# Altium PCB ac-control-pcb.PcbDoc
Units mil, origin at the board's own origin, x right, y up, seen from the top; angles counter-clockwise.
Board outline 4035 x 1820 mil, 2 copper layers (Top Layer, Bottom Layer); 12 components, 21 nets, 90 pads, 0 vias.
Unrouted connection lines stored in the file: 1.
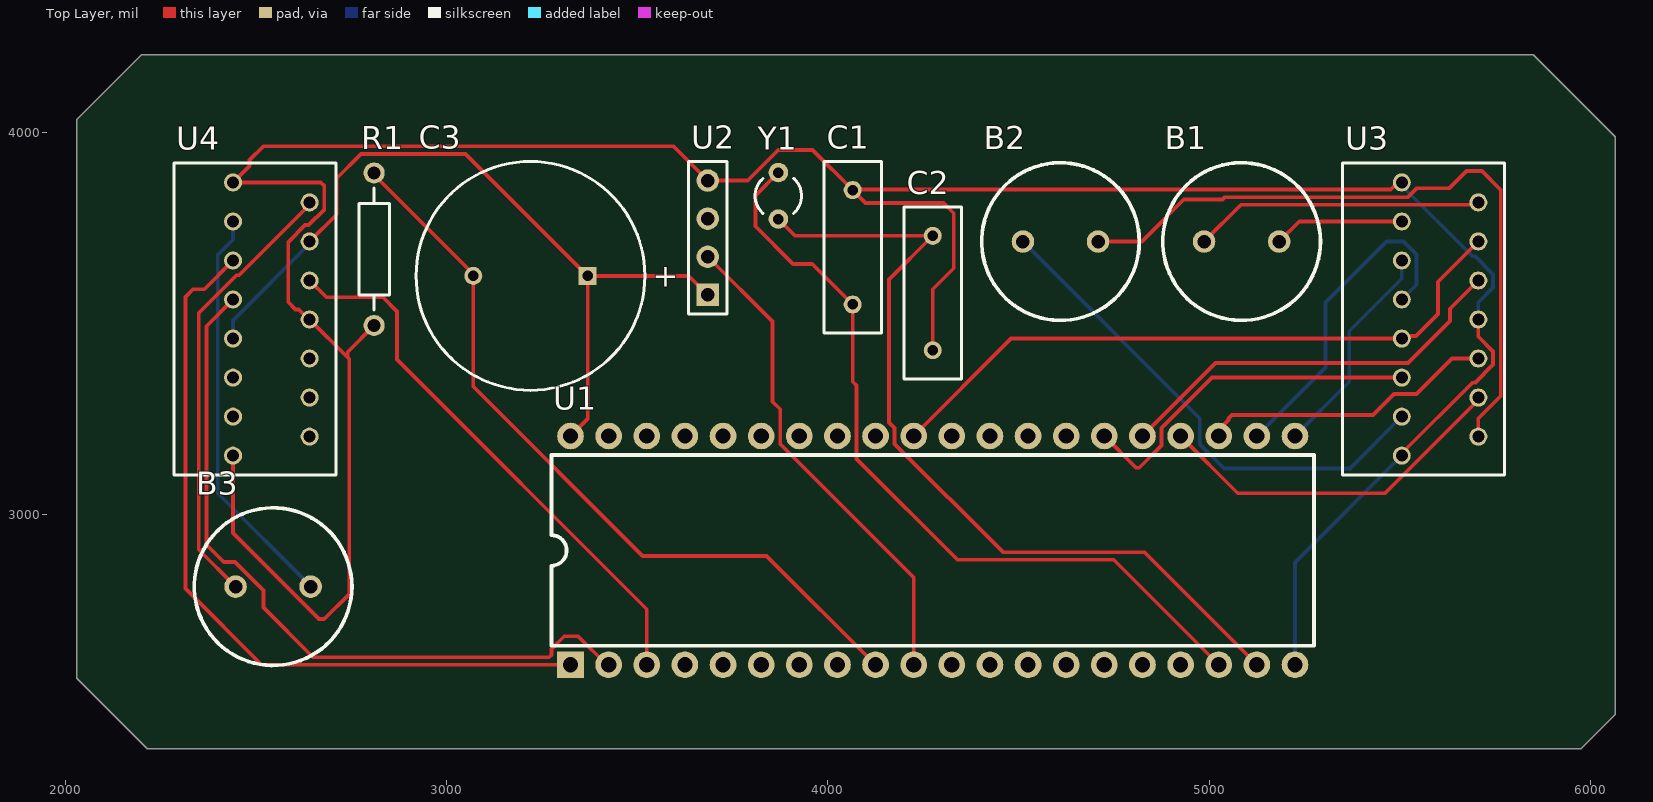
[diagram p0: Top Layer view]
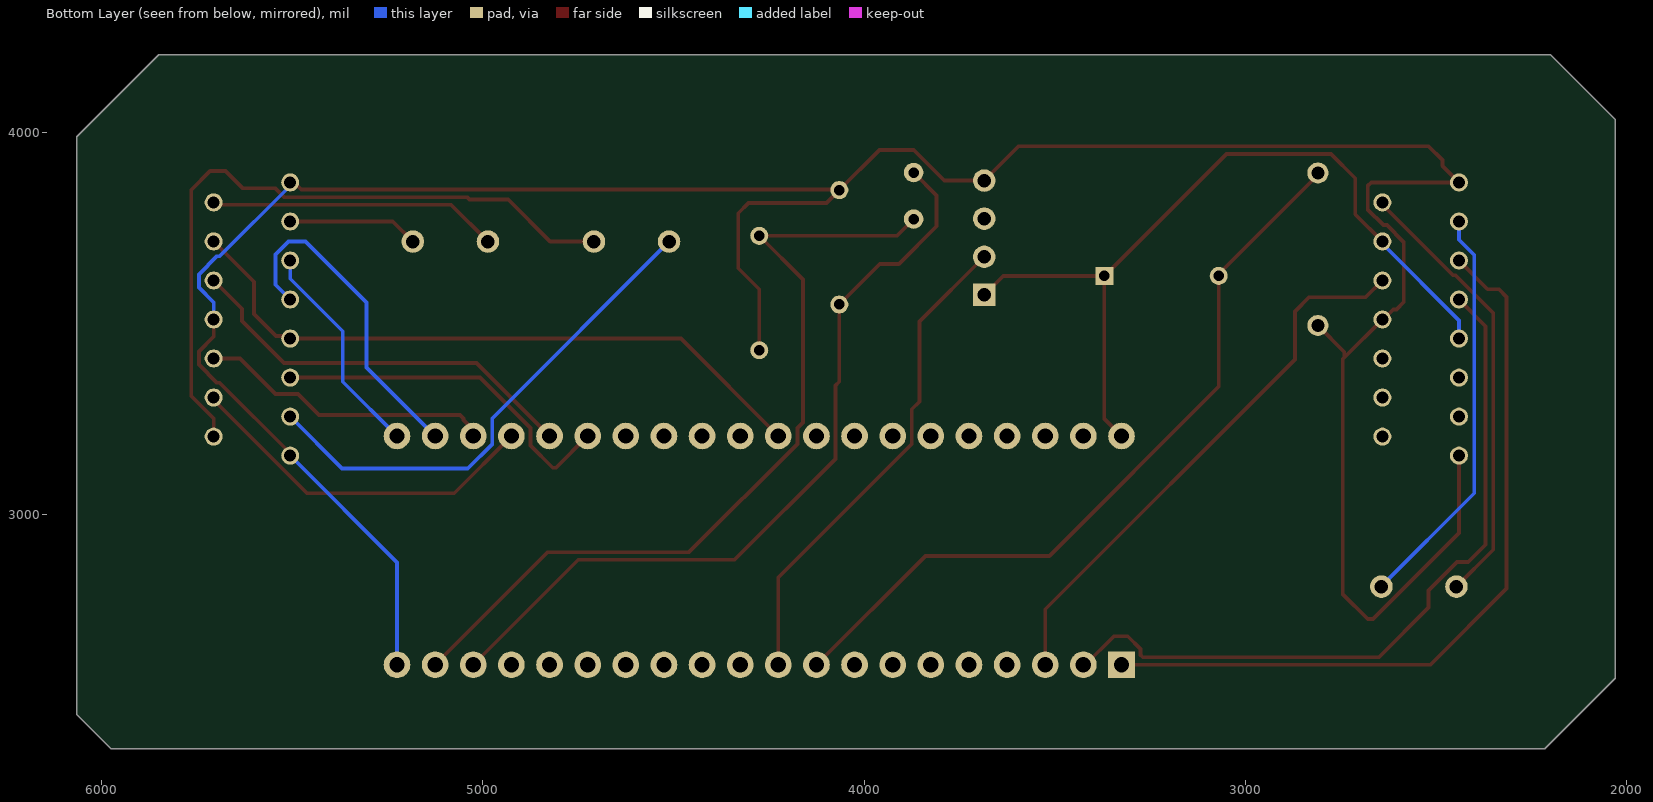
[diagram p1: Bottom Layer view, seen from below]

## Layer stack, top to bottom
Top Solder: solder mask 0.4, Solder Resist, Dk 3.5
Top Layer: signal copper 1.4
Dielectric 1: dielectric 12.6, FR-4, Dk 4.8
Bottom Layer: signal copper 1.4
Bottom Solder: solder mask 0.4, Solder Resist, Dk 3.5

## Board outline
2215,2385 2030,2570 2030,4035 2200,4205 5850,4205 6065,3990 6065,2475 5975,2385

## Design rules (kind name [scope] priority, off if disabled: settings)
Clearance [All] p1: gap=10 ignorepadtopadclearanceinfootprint=FALSE except(0: Arc-Hole Track-Hole SMDPad-Hole THPad-Hole Via-Hole Fill-Hole Poly-Hole Region-Hole Text-Hole)
PolygonConnect [All] p1: connectstyle=Relief reliefconductorwidth=10 reliefentries=4 polygonreliefangle="90 Angle" airgapwidth=10
RoutingVias [All] p1: holewidth=28 width=50 viastyle="Through Hole" minholewidth=28 minwidth=50 maxholewidth=28 maxwidth=50
SolderMaskExpansion [All] p1: expansion=4
Width [All] p1: maxlimit=10 minlimit=10 preferedwidth=10
30 further rules are at their usual default settings.

## Components (designator, comment, footprint, x,y, rotation, side; value= is the part's Value field where it differs from the comment)
B1 "Motor-refrigeration" RB5-10.5 5085,3715 r0 top
B2 "Motor-heating" RB5-10.5 4610,3715 r0 top
B3 "Motor-dehumidification" RB5-10.5 2545,2810 r0 top
C1 "Cap" RAD-0.3 4065,3700 r90 top value=22pF
C2 "Cap" RAD-0.3 4275,3580 r90 top value=22pF
C3 "Cap Pol1" RB7.6-15 3220,3625 r0 top value=10uF
R1 "Res2" AXIAL-0.4 2810,3695 r90 top value=10K
U1 "AT89C52" DIP-40W 3325,2605 r90 top
U2 "DHT11" HDR1X4 3685,3575 r90 top
U3 "L298" L298 5505,3870 r0 top
U4 "L298" L298 2440,3870 r0 top
Y1 "XTAL" R38 3870,3835 r0 top

## Footprints (in the part's own frame and the unit in brackets; to place one, negate y for a bottom-side part, rotate by r counter-clockwise, add the part's x,y. Pads: shape width x height; smd on the part's side, far side on the other; paste and mask are expansions set on the pad)
AXIAL-0.4 [mm] "Axial Device, Thru-Hole; 2 Leads; 0.4 in Pin Spacing"
  round 1.4 hole 0.85: 1(-5.08,0) 2(5.08,0)
  silkscreen extent -4.06,-1.02 4.06,1.02
DIP-40W [mil]
  rect 70x70 hole 40: 1(0,0)
  round 70 hole 40: 2(0,-100) 3(0,-200) 4(0,-300) 5(0,-400) 6(0,-500) 7(0,-600) 8(0,-700) 9(0,-800) 10(0,-900) 11(0,-1000) 12(0,-1100) 13(0,-1200) 14(0,-1300) 15(0,-1400) 16(0,-1500) 17(0,-1600) 18(0,-1700) 19(0,-1800) 20(0,-1900) 21(600,-1900) 22(600,-1800) 23(600,-1700) 24(600,-1600) 25(600,-1500) 26(600,-1400) 27(600,-1300) 28(600,-1200) 29(600,-1100) 30(600,-1000) 31(600,-900) 32(600,-800) 33(600,-700) 34(600,-600) 35(600,-500) 36(600,-400) 37(600,-300) 38(600,-200) 39(600,-100) 40(600,0)
  silkscreen extent 50,-1950 550,50
HDR1X4 [mm] "Connector; Header; 4 Position"
  rect 1.5x1.5 hole 0.9: 1(0,0)
  round 1.5 hole 0.9: 2(2.54,0) 3(5.08,0) 4(7.62,0)
  silkscreen extent -1.27,-1.27 8.89,1.27
L298 [mm]
  round 1.2 hole 0.8: 1(0,0) 2(5.1,-1.33) 3(0,-2.6) 4(5.1,-3.93) 5(0,-5.2) 6(5.1,-6.53) 7(0,-7.8) 8(5.1,-9.13) 9(0,-10.4) 10(5.1,-11.73) 11(0,-13) 12(5.1,-14.33) 13(0,-15.6) 14(5.1,-16.93) 15(0,-18.2)
  silkscreen extent -3.94,-19.5 6.86,1.3
R38 [mm] "Crystal, Thru-Hole; 2 Leads; Body 3.1 x 8.2 mm (Dia.xH)"
  round 1.3 hole 0.7: 1(0,1.55) 2(0,-1.55)
  silkscreen extent -1.55,-1.19 1.55,1.17
RAD-0.3 [mm] "Radial Cap, Thru-Hole; 2 Leads; 0.3 in Pin Spacing"
  round 1.2 hole 0.7: 1(-3.81,0) 2(3.81,0)
  silkscreen extent -5.71,-1.91 5.71,1.91
RB5-10.5 [mm] "Capacitor (Radial); 2 Leads"
  round 1.5 hole 0.9: 1(-2.5,0) 2(2.5,0)
  silkscreen extent -5.25,-5.25 5.25,5.25
RB7.6-15 [mm] "Polarized Capacitor (Radial); 2 Leads"
  rect 1.2x1.2 hole 0.7: 1(3.81,0)
  round 1.2 hole 0.7: 2(-3.81,0)
  silkscreen extent -7.62,-7.62 7.62,7.62

## Part data
B1 B2 B3: library part Motor, "Motor, General Kind", LatestRevisionDate=17-Jul-2002, LatestRevisionNote="Re-released for DXP Platform.", PackageDescription="Capacitor (Radial); 2 Leads", PackageReference=RB5-10.5, Published=24-Mar-1999, Publisher="Altium Limited"
C1 C2: "Capacitor", LatestRevisionDate=17-Jul-2002, LatestRevisionNote="Re-released for DXP Platform.", PackageDescription="Radial Cap, Thru-Hole; 2 Leads; 0.3 in Pin Spacing", PackageReference=RAD-0.3, Published=8-Jun-2000, Publisher="Altium Limited"
C3: "Polarized Capacitor (Radial)", LatestRevisionDate=17-Jul-2002, LatestRevisionNote="Re-released for DXP Platform.", PackageDescription="Polarized Capacitor (Radial); 2 Leads", PackageReference=RB7.6-15, Published=8-Jun-2000, Publisher="Altium Limited"
R1: "Resistor", LatestRevisionDate=17-Jul-2002, LatestRevisionNote="Re-released for DXP Platform.", PackageDescription="Axial Device, Thru-Hole; 2 Leads; 0.4 in Pin Spacing", PackageReference=AXIAL-0.4, Published=8-Jun-2000, Publisher="Altium Limited"
U1: "8-Bit Microcontroller with 8K Flash ROM"
U2: library part Component_1
U3 U4: library part L298N
Y1: "Crystal Oscillator", LatestRevisionDate=17-Jul-2002, LatestRevisionNote="Re-released for DXP Platform.", PackageDescription="Crystal, Thru-Hole; 2 Leads; Body 3.1 x 8.2 mm (Dia.xH)", PackageReference=R38, Published=8-Jun-2000, Publisher="Altium Limited"

## Nets (pads, with @x,y where several pads share a name; then routed paths per layer and width w, separated by ;. In a path a pad name is that pad's centre, name@x,y a point inside that pad or via, vN(x,y) a via of type N, cw(c..) or ccw(c..) an arc to the next point about the centre after c; other vN are vias at no path point)
+: C3.1 U1.31 U1.40 U2.1 U3.4 U3.9 U4.4 U4.9 | length 3866.2
  Top Layer w10: U4.4 2711.89,3786.37 2711.89,3881.03 2775.86,3945 3050,3945 C3.1 ; U1.40 3370,3250 C3.1 ; U2.1 3635,3625 C3.1 ; U1.31 4480.55,3460.55 U3.9 5512.13,3467.68 5542.68,3467.68 5600,3525 5600,3609.49 U3.4
  Bottom Layer w10: U4.9 2440,3508.29 2640.79,3709.08 U4.4
GND: C1.2 C2.1 R1.1 U1.20 U2.4 U3.1 U3.8 U3.15 U4.1 U4.8 U4.15 | length 7698.4
  Top Layer w10: U4.15 2440,2950.45 2665.45,2725 2679.14,2725 2745,2790.86 2745,3406.34 2740.67,3410.67 ; R1.1 2740.67,3425.67 2740.67,3410.67 ; C2.1 4275,3590.04 4330,3645.04 4330,3789.14 4303.13,3816.01 4098.99,3816.01 C1.2 ; U3.15 5505,3159.66 5689.79,3344.45 5696.67,3344.45 5744.41,3392.19 5744.41,3427.02 5705.79,3465.64 U3.8 ; U3.1 5494.92,3870 5476.3,3851.38 4066.38,3851.38 C1.2 ; 2740.67,3410.67 U4.8 2638.6,3510.55 2612.38,3536.77 2604.09,3536.77 2585,3555.86 2585,3714.11 2629.03,3758.14 2638.14,3758.14 2679.41,3799.41 2679.41,3860.59 2670,3870 U4.1 2483.56,3913.56 2483.56,3928.56 2520,3965 3595,3965 U2.4 3790,3875 3870,3955 3960,3955 C1.2
  Bottom Layer w10: U1.20 5225,2873.46 U3.15 ; U3.1 5505,3861.44 5689.79,3676.65 5696.67,3676.65 5744.41,3628.91 5744.41,3594.08 5705.79,3555.46 U3.8
NetB1_1: B1.1 U3.2 | length 761.7
  Top Layer w10: B1.1 5082.95,3811.38 5699.53,3811.38 U3.2
NetB1_2: B1.2 U3.3 | length 343.4
  Top Layer w10: B1.2 5236.06,3767.64 U3.3
NetB2_1: B2.1 U3.13 | length 1335.6
  Bottom Layer w10: B2.1 4975,3251.57 4975,3184.29 5039.29,3120 5369.17,3120 U3.13
NetB2_2: B2.2 U3.14 | length 1824.5
  Top Layer w10: B2.2 4823.35,3715 4933.35,3825 5035,3825 5041.38,3831.38 5521,3831.38 5544.62,3855 5630,3855 5675,3900 5715,3900 5764.41,3850.59 5764.41,3309.83 5705.79,3251.21 U3.14
NetB3_1: B3.1 U4.2 | length 1172.1
  Top Layer w10: B3.1 2350,2906.57 2350,3527.53 2449.12,3626.65 2456,3626.65 2640.79,3811.44 U4.2
NetB3_2: B3.2 U4.3 | length 1075
  Bottom Layer w10: U4.3 2440,3719.9 2400,3679.9 2400,3055 2643.43,2811.57 B3.2
NetC1_1: C1.1 U1.18 Y1.1 | length 2088.6
  Top Layer w10: Y1.1 3810,3836.02 3810,3755 3908.94,3656.06 3958.94,3656.06 C1.1 4065,3347.46 4075,3337.46 4075,3145 4339.61,2880.39 4749.61,2880.39 U1.18
NetC2_2: C2.2 U1.19 Y1.2 | length 2212.4
  Top Layer w10: Y1.2 3913.98,3730 C2.2 4160.36,3615.36 4160.36,3240.36 4175,3225.71 4175,3184.29 4458.9,2900.39 4829.61,2900.39 U1.19
NetC3_2: C3.2 R1.2 U1.9 | length 2025.1
  Top Layer w10: R1.2 2810,3890 3070,3630 C3.2 3070,3335 3514.26,2890.74 3839.26,2890.74 U1.9
NetU1_1: U1.1 U4.5 | length 2022.3
  Top Layer w10: U4.5 2364.72,3590 2335,3590 2315,3570 2315,2805 2515,2605 U1.1
NetU1_2: U1.2 U4.7 | length 1938
  Top Layer w10: U4.7 2370,3492.91 2370,2920 2415.78,2874.22 2445.32,2874.22 2520,2799.55 2520,2755 2650,2625 3269.14,2625 3275,2630.86 3275,2646.21 3308.79,2680 3345,2680 3420,2605 U1.2
NetU1_3: U1.3 U4.6 | length 1460.9
  Top Layer w10: U4.6 2684.96,3568.74 2832.96,3568.74 2870,3531.7 2870,3405.62 3525,2750.62 U1.3
NetU1_10: U1.10 U2.2 | length 1293.7
  Top Layer w10: U2.2 3855,3505 3855,3295 3875,3275 3875,3184.29 4225,2834.29 U1.10
NetU1_21: U1.21 U3.5 | length 576.3
  Bottom Layer w10: U1.21 5367.18,3347.18 5367.18,3479.71 5505,3617.53 U3.5
NetU1_22: U1.22 U3.7 | length 877.8
  Bottom Layer w10: U1.22 5305,3385 5305,3555 5465,3715 5509.9,3715 5543.62,3681.27 5543.62,3601.54 U3.7
NetU1_23: U1.23 U3.10 | length 776.7
  Top Layer w10: U1.23 5025,3221.24 5050.62,3246.86 5050.62,3250.62 5060,3260 5430,3260 5485,3315 5543.76,3315 5636.95,3408.19 U3.10
NetU1_24: U1.24 U3.12 | length 950.4
  Top Layer w10: U1.24 5075,3055 5461.16,3055 5705.79,3299.63 U3.12
NetU1_25: U1.25 U3.6 | length 1068.6
  Top Layer w10: U1.25 5016.81,3396.81 5521.81,3396.81 5631.83,3506.83 5631.83,3538.96 U3.6
NetU1_26: U1.26 U3.11 | length 939.3
  Top Layer w10: U1.26 4808.36,3121.64 4816.64,3121.64 4875,3180 4875,3225.71 5007.48,3358.19 U3.11
pads on no net: U1.4 U1.5 U1.6 U1.7 U1.8 U1.11 U1.12 U1.13 U1.14 U1.15 U1.16 U1.17 U1.27 U1.28 U1.29 U1.30 U1.32 U1.33 U1.34 U1.35 U1.36 U1.37 U1.38 U1.39 U2.3 U4.10 U4.11 U4.12 U4.13 U4.14

## Silkscreen, mask and mechanical layers (free items; w line width, h text height)
Drill Drawing:
  lines w10: 2030,2570 2030,4035 2200,4205 2235,4205 5850,4205 6065,3990 6065,2475 5975,2385 2215,2385 2030,2570

## Text inside footprints (layer, text, board x,y; h text height)
C3: Top Overlay "+" at 3540.15,3595.99 h59.06